# Altium PCB PCB2.PcbDoc
Units mm, origin at the board's own origin, x right, y up, seen from the top; angles counter-clockwise.
Board outline 80 x 80 mm, 4 copper layers (Top Layer, Int1 (GND), Int2 (PWR), Bottom Layer), stack 1.369 mm thick; 59 components, 28 nets, 206 pads, 294 vias.
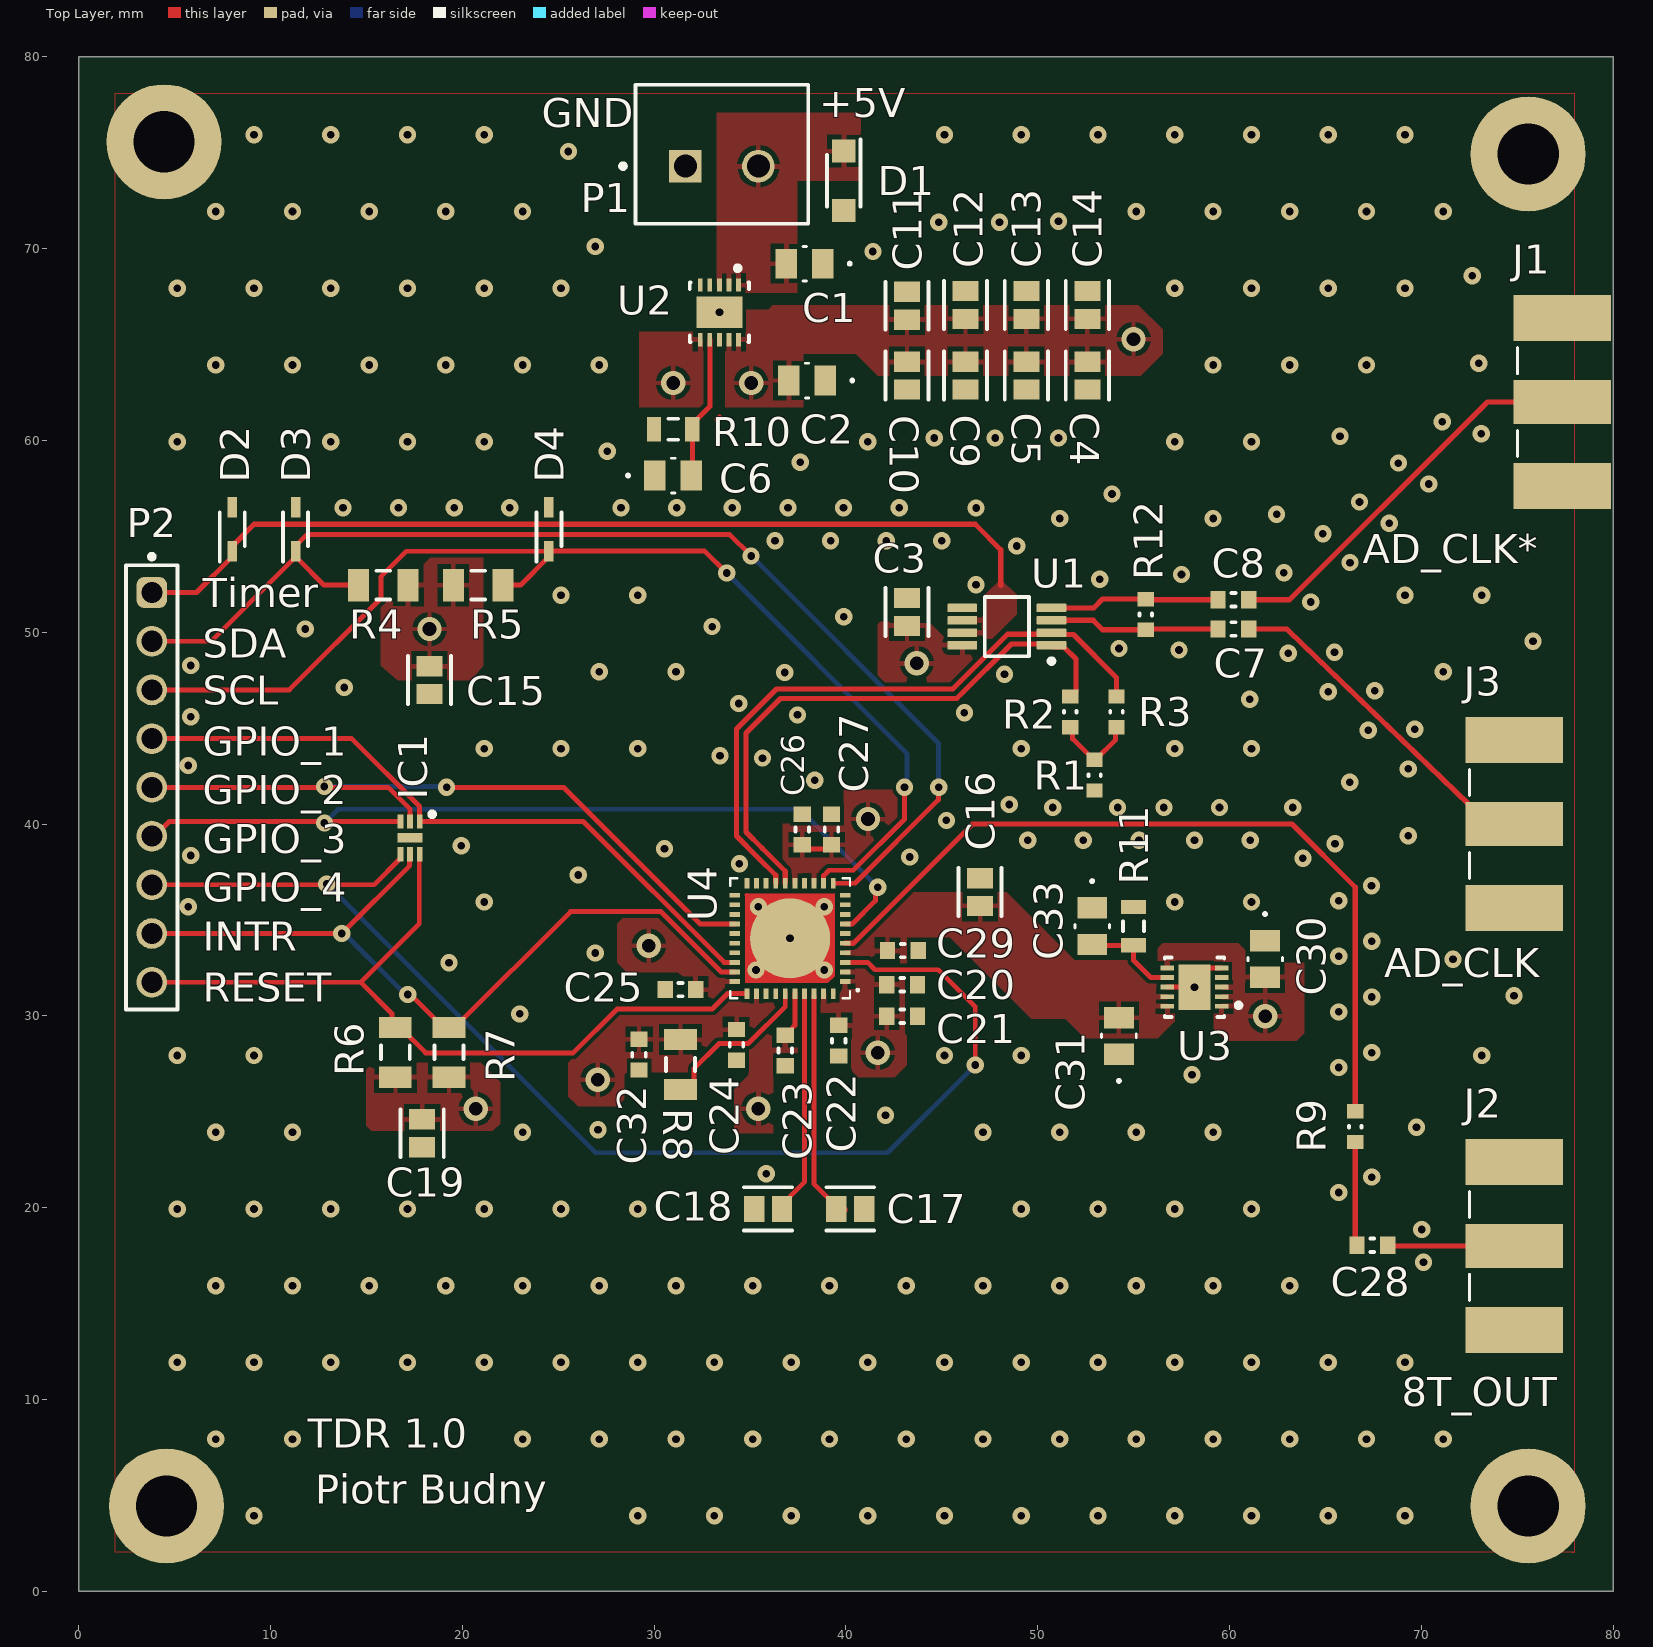
[diagram p0: Top Layer view]
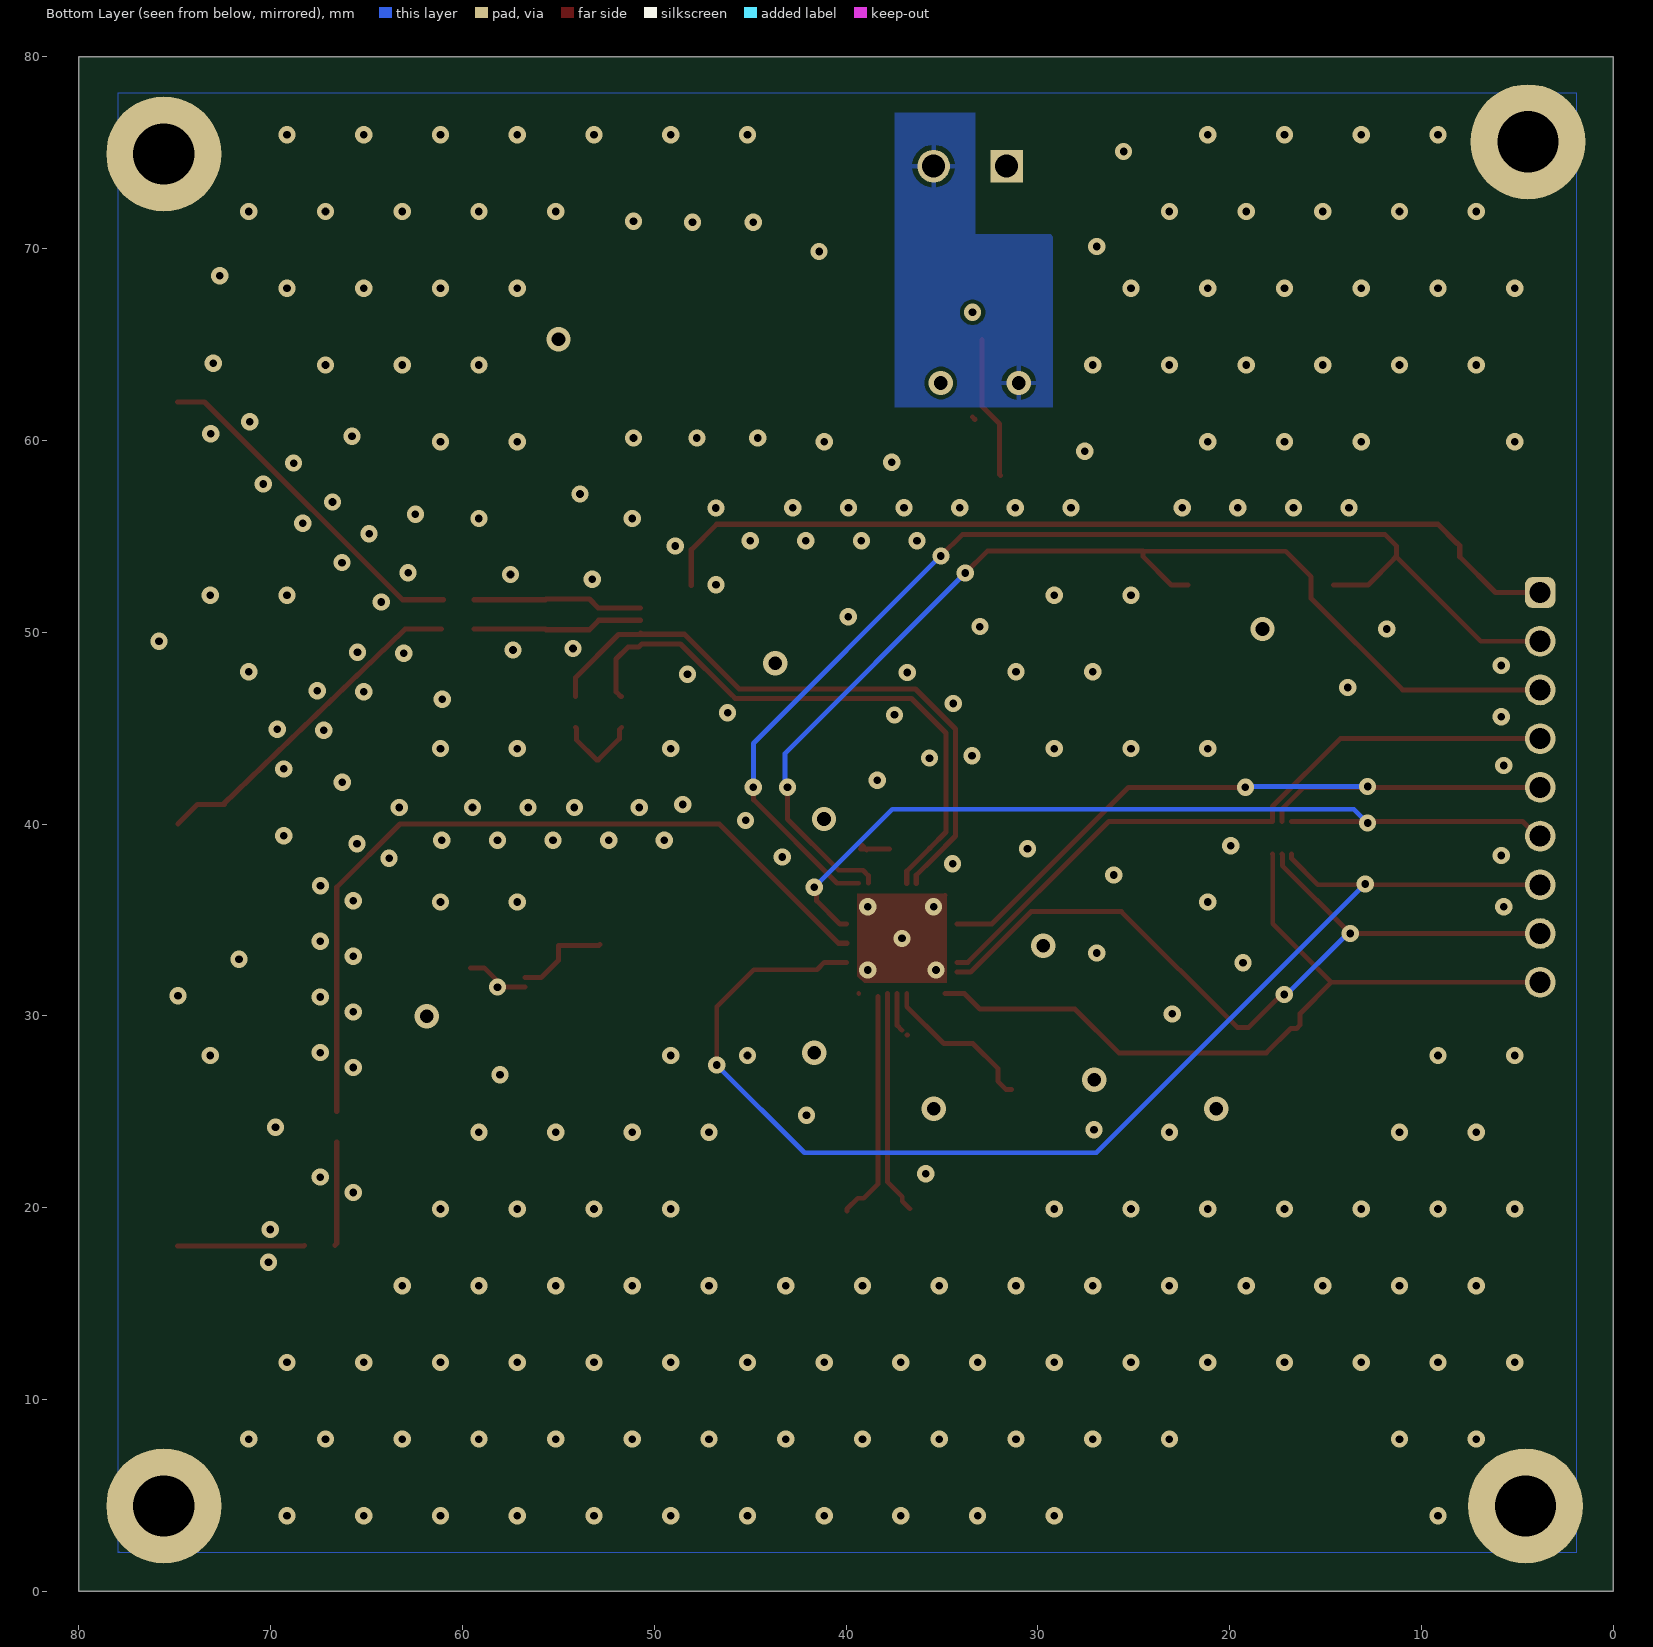
[diagram p1: Bottom Layer view, seen from below]
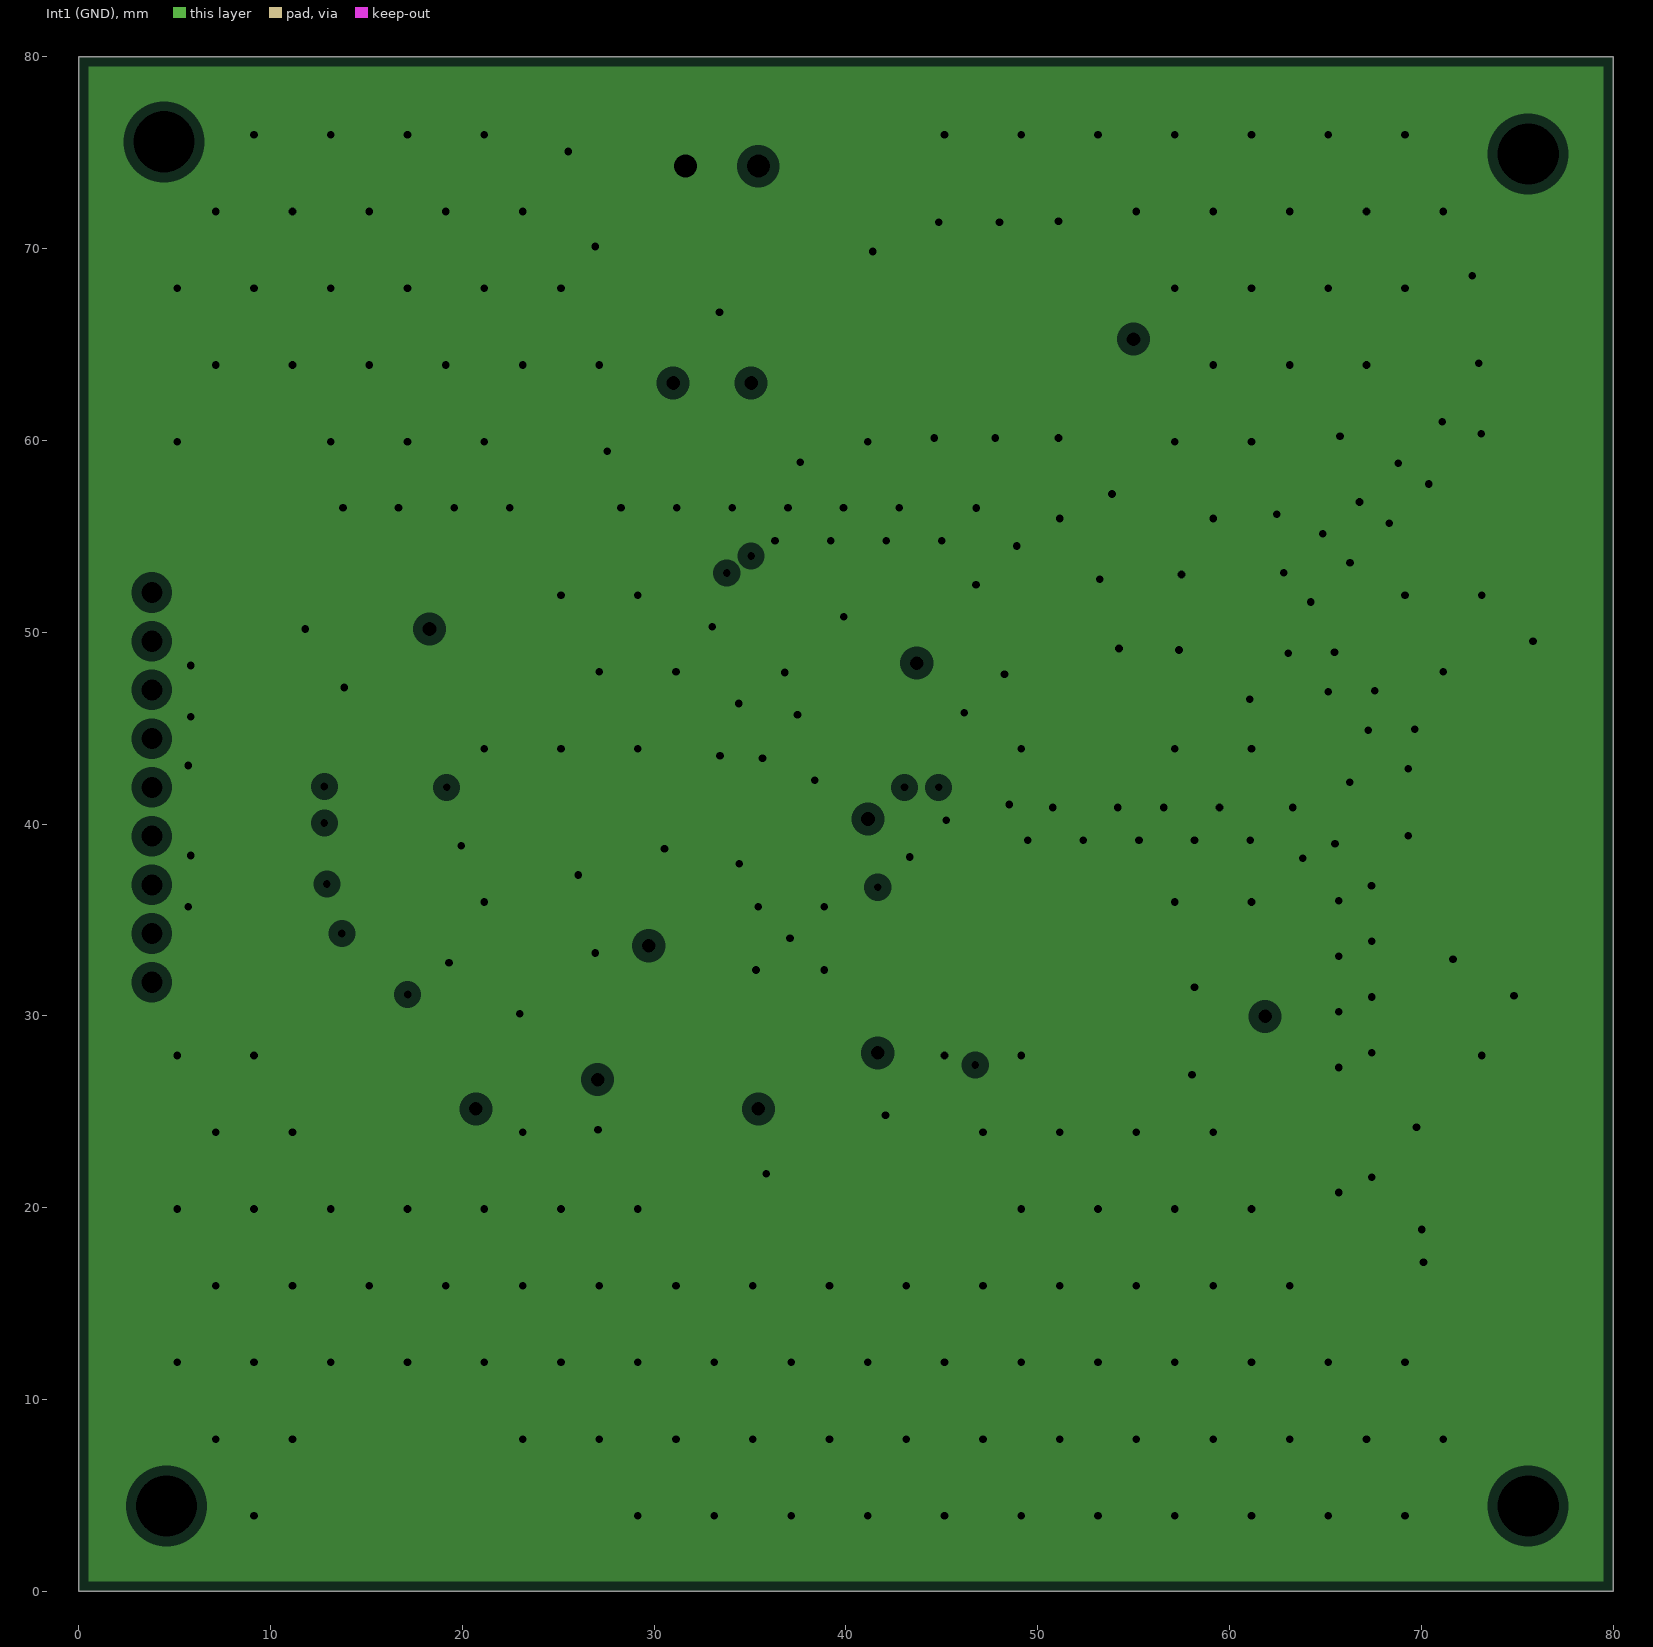
[diagram p2: Int1 (GND), clearances drawn from the general rule]
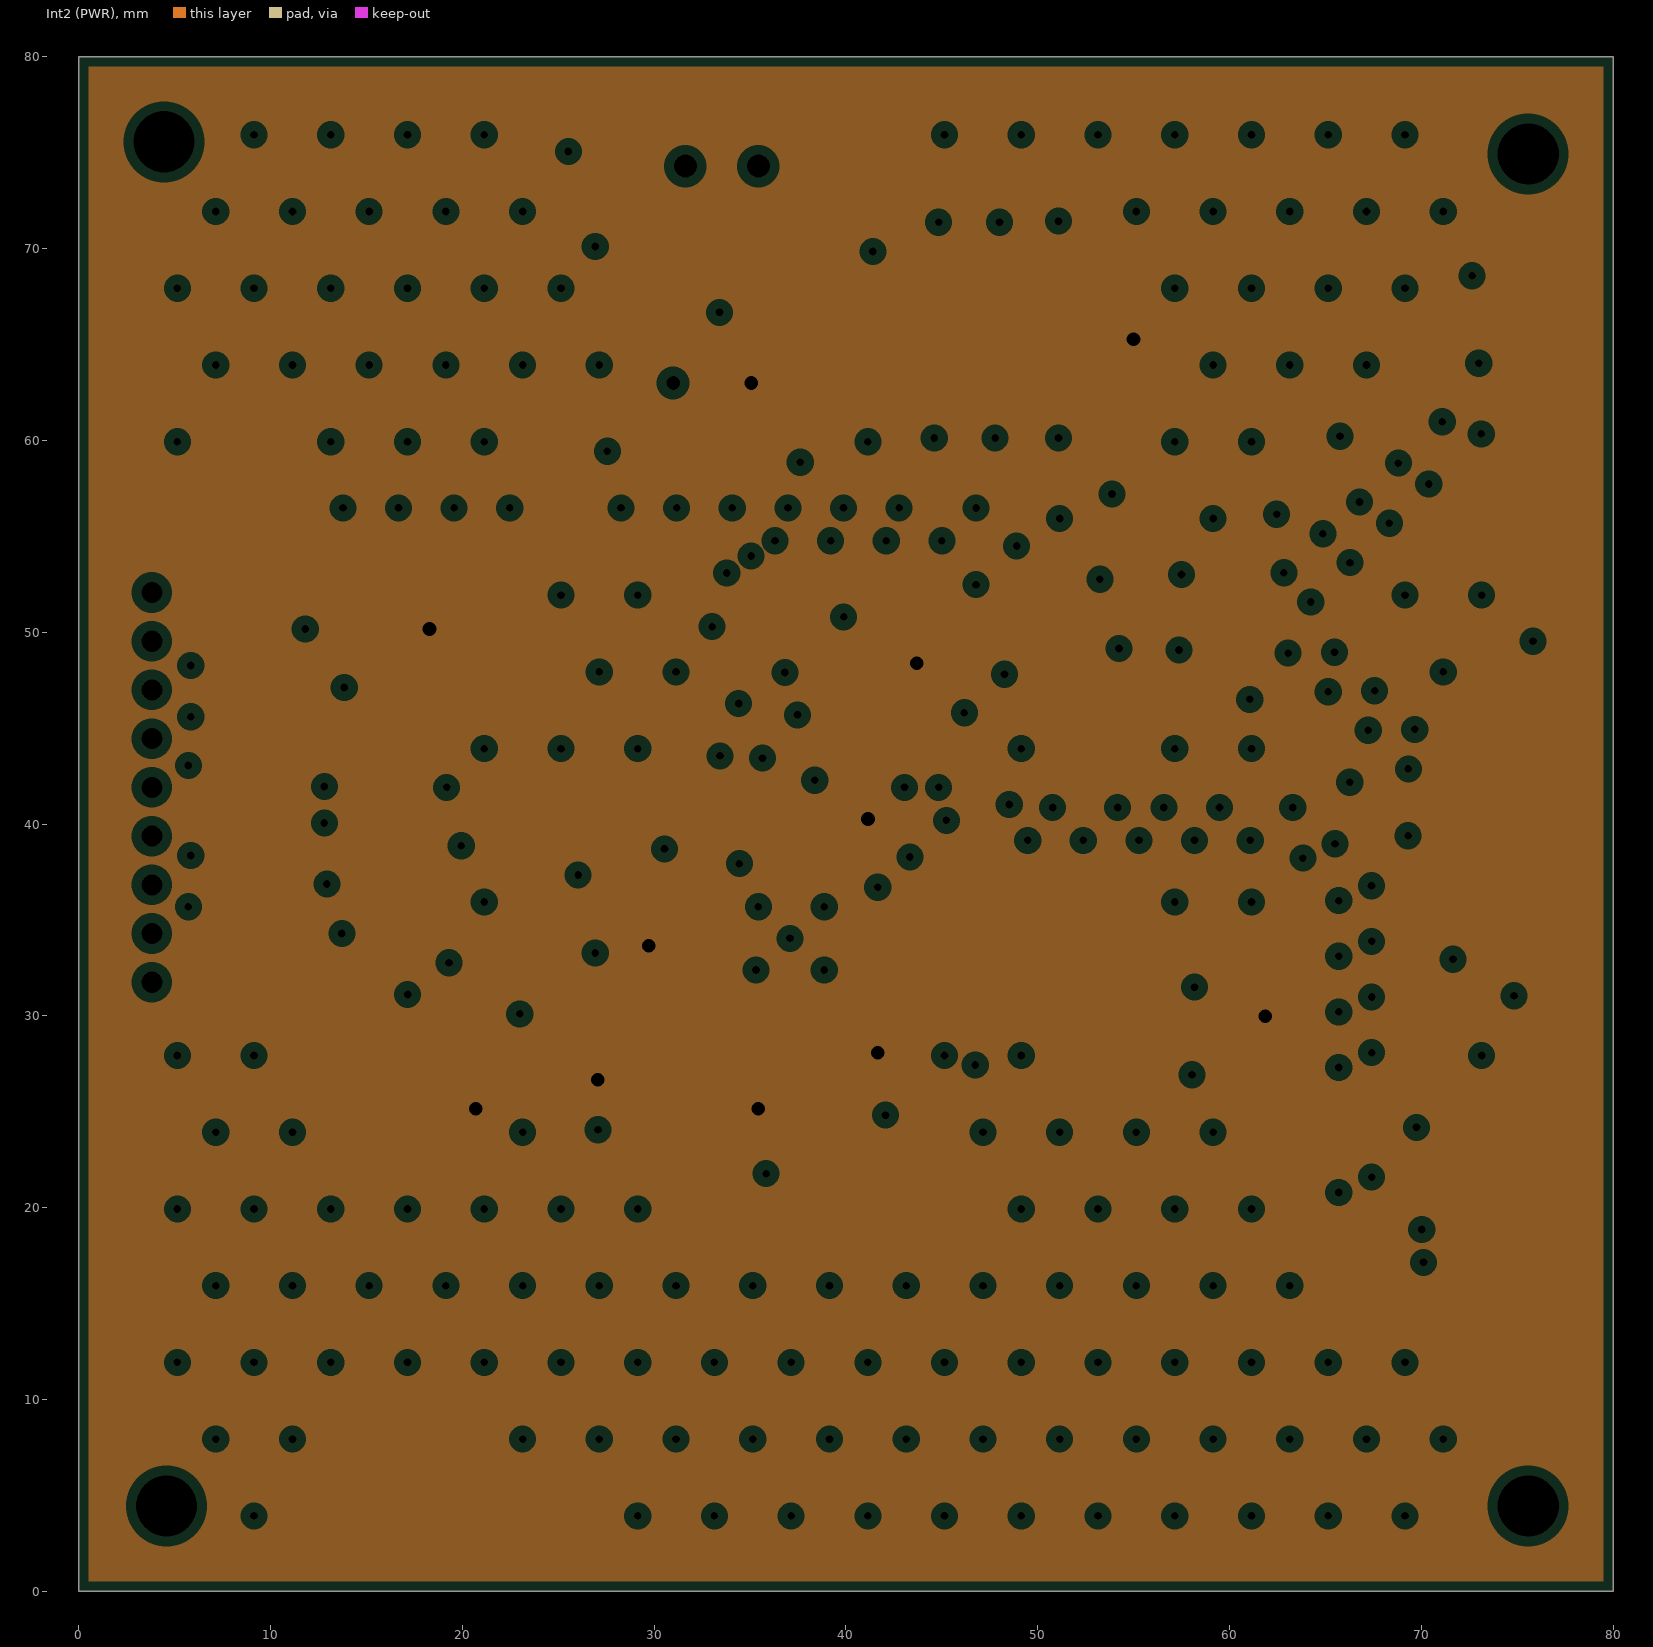
[diagram p3: Int2 (PWR), clearances drawn from the general rule]
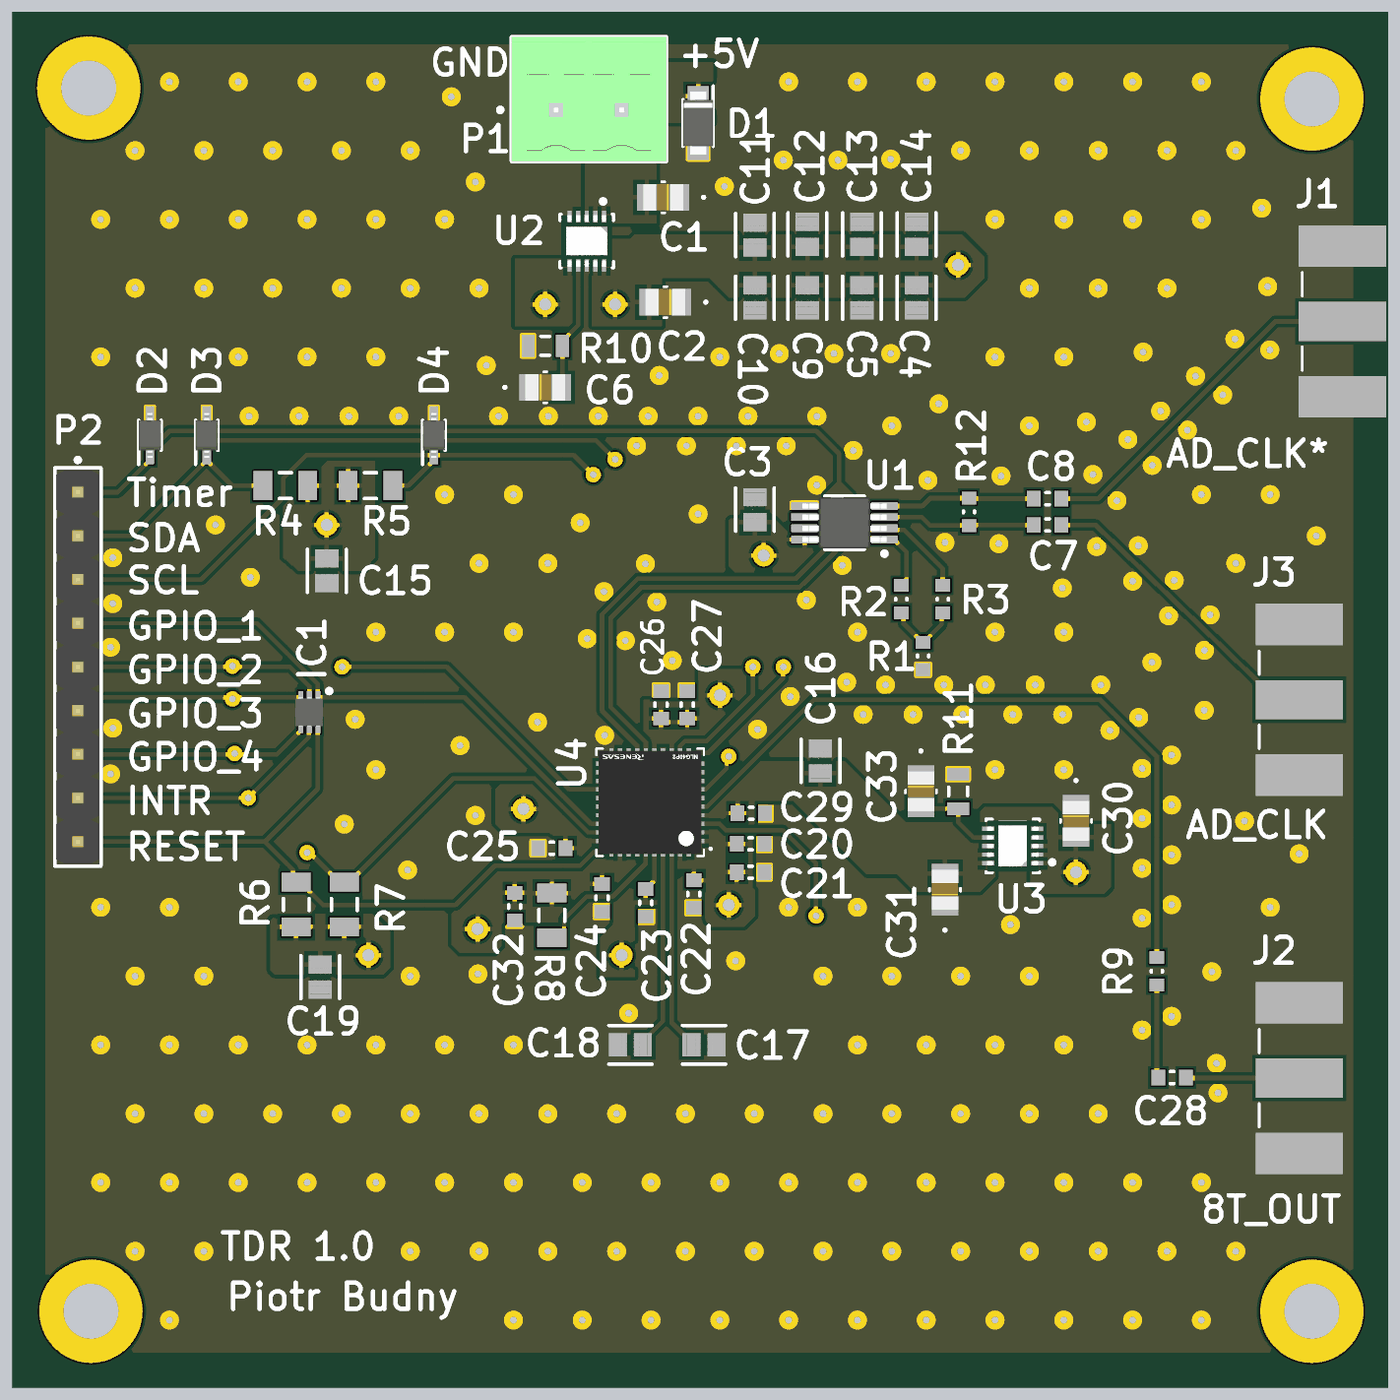
[diagram p4: 3D render of the assembled board from above, using the file's embedded part models]

## Layer stack, top to bottom
Top Solder: solder mask 0.0254, SM-001, Dk 4
Top Layer: signal copper 0.035
Dielectric 1: prepreg 0.1295, PP-017, Dk 4.3
Dielectric 2: prepreg 0.1295, PP-017, Dk 4.3
Int1 (GND): plane copper 0.035, net GND
Dielectric 3: core 0.7112, Core-039, Dk 4.8
Int2 (PWR): plane copper 0.035, net +3V3
Dielectric 4: prepreg 0.1295, PP-017, Dk 4.3
Dielectric 5: prepreg 0.1295, PP-017, Dk 4.3
Bottom Layer: signal copper 0.035
Bottom Solder: solder mask 0.0254, SM-001, Dk 4

## Board outline
0,0 0,80 80,80 80,0

## Design rules (kind name [scope] priority, off if disabled: settings)
Clearance [All] p1: gap=0.203 ignorepadtopadclearanceinfootprint=TRUE
DiffPairsRouting [All] p1: maxlimit=0.254 minlimit=0.203 mostfreqgap=0.254 toplayer_minwidth=0.254 toplayer_maxwidth=0.254 toplayer_prefwidth=0.254 bottomlayer_minwidth=0.381 bottomlayer_maxwidth=0.381 bottomlayer_prefwidth=0.381 maxuncoupledlength=12.7
HoleSize [All] p1: absolutevalues=TRUE maxlimit=3.2 minlimit=0.025 maxpercent=80.000 minpercent=20.000
MinimumSolderMaskSliver [All] p1: minsoldermaskwidth=0.2
PlaneClearance [All] p1: clearance=0.508
PlaneConnect [All] p1: planeconnectstyle=Relief reliefexpansion=0.508 reliefentries=4 reliefconductorwidth=0.254 reliefairgap=0.254
PolygonConnect PolygonConnect_2 [All vs IsNamedPolygon('NONET_L04_P043')] p1: connectstyle=Direct reliefconductorwidth=0.254 reliefentries=4 polygonreliefangle="90 Angle" airgapwidth=0.254
PolygonConnect PolygonConnect_1 [All vs IsNamedPolygon('NONET_L01_P042')] p2: connectstyle=Direct reliefconductorwidth=0.254 reliefentries=4 polygonreliefangle="90 Angle" airgapwidth=0.254
PolygonConnect [All] p3: connectstyle=Relief reliefconductorwidth=0.254 reliefentries=4 polygonreliefangle="90 Angle" airgapwidth=0.254
RoutingVias [All] p1: holewidth=0.711 width=1.27 viastyle="Through Hole" minholewidth=0.711 minwidth=1.27 maxholewidth=0.711 maxwidth=1.27
SilkToSolderMaskClearance [IsPad] p1: minsilkscreentomaskgap=0.2 clearancetoexposedcopper=TRUE
SolderMaskExpansion [All] p1: expansion=0.102 istentingtop=FALSE
SupplyNets "Schematic Supply Nets_2" [InNet('+3V3')] p1: voltage=0.000
SupplyNets "Schematic Supply Nets_1" [InNet('+1V8')] p2: voltage=0.000
SupplyNets "Schematic Supply Nets" [InNet('GND')] p3: voltage=0.000
Width [InNetClass('IMP50')] p1: maxlimit=0.272 minlimit=0.272 preferedwidth=0.272 impedanceprofiledriven=TRUE impedanceprofileid={48875BC2-758B-4BB3-9FE0-D4E46BE26CB8} impedanceprofilevalue=50.000000 minimp=50.000000 maximp=50.000000 favimp=50.000000
24 further rules are at their usual default settings.

## Classes and differential pairs
component class TDR_Schematic_PB: C1 C2 C3 C4 C5 C6 C7 C8 C9 C10 C11 C12 C13 C14 C15 C16 C17 C18 C19 C20 C21 C22 C23 C24 C25 C26 C27 C28 C29 C30 C31 C32 C33 D1 D2 D3 D4 IC1 P1 P2 R1 R2 R3 R4 R5 R6 R7 R8 R9 R10 R11 R12 U1 U2 U3 U4
differential pair ADC_CLK: +ADC_CLK_P -ADC_CLK_N
differential pair 8T_CLK: +8T_CLK_P -8T_CLK_N

## Components (designator, comment, footprint, x,y, rotation, side; value= is the part's Value field where it differs from the comment)
C1 "4.7 uF" CAP_C0805X-HAC-DR_KEM 37.846,69.215 r180 top
C2 "10 uF" CAP_C0805X-HAC-DR_KEM 37.973,63.119 r180 top
C3 "0.1uF" FP-CL21-IPC_C 43.18,51.054 r90 top (schematic designator C6)
C4 "0.1uF" FP-CL21-IPC_C 52.578,63.373 r270 top
C5 "0.1uF" FP-CL21-IPC_C 49.403,63.373 r270 top
C6 "DNM" CAP_C0805X-HAC-DR_KEM 30.988,58.166 r0 top (schematic designator C3)
C7 "10pF" CAPC0603 60.198,50.165 r0 top (schematic designator C4)
C8 "10pF" CAPC0603 60.198,51.689 r0 top (schematic designator C5)
C9 "0.1uF" FP-CL21-IPC_C 46.228,63.373 r270 top
C10 "0.1uF" FP-CL21-IPC_C 43.18,63.373 r270 top
C11 "0.1uF" FP-CL21-IPC_C 43.18,67.02 r90 top
C12 "0.1uF" FP-CL21-IPC_C 46.228,67.056 r90 top
C13 "0.1uF" FP-CL21-IPC_C 49.403,67.056 r90 top
C14 "0.1uF" FP-CL21-IPC_C 52.578,67.056 r90 top
C15 "0.1uF" FP-CL21-IPC_C 18.288,47.498 r90 top
C16 "0.1uF" FP-CL21-IPC_C 46.99,36.449 r90 top
C17 "0.1uF" FP-CL21-IPC_C 40.223,19.939 r0 top
C18 "0.1uF" FP-CL21-IPC_C 35.941,19.939 r180 top
C19 "0.1uF" FP-CL21-IPC_C 17.907,23.876 r270 top
C20 "100pF" CAPC0603 42.926,31.623 r180 top
C21 "100pF" CAPC0603 42.926,29.972 r180 top
C22 "100pF" CAPC0603 39.624,28.702 r90 top
C23 "100pF" CAPC0603 36.83,28.194 r90 top
C24 "100pF" CAPC0603 34.29,28.486 r90 top
C25 "100pF" CAPC0603 31.369,31.369 r0 top
C26 "100pF" CAPC0603 37.719,39.713 r270 top
C27 "100pF" CAPC0603 39.243,39.713 r270 top
C28 "10pF" CAPC0603 67.437,18.034 r0 top
C29 "100pF" CAPC0603 42.964,33.401 r0 top
C30 "4.7uF" CAP_C0805X-HAC-DR_KEM 61.849,32.956 r270 top (schematic designator C35)
C31 "10uF" CAP_C0805X-HAC-DR_KEM 54.229,28.956 r90 top (schematic designator C36)
C32 "100pF" CAPC0603 29.21,27.978 r90 top
C33 "DNM" CAP_C0805X-HAC-DR_KEM 52.832,34.671 r270 top (schematic designator C41)
D1 "SMF5.0A-T13" SODFL3618X110N 39.878,73.533 r270 top
D2 "AQ4020-01FTG" SOD2613X114N 8.001,55.372 r90 top (schematic designator D3)
D3 "AQ4020-01FTG" SOD2613X114N 11.303,55.372 r90 top (schematic designator D4)
D4 "AQ4020-01FTG" SOD2613X114N 24.512,55.372 r90 top (schematic designator D5)
IC1 "UCLAMP3306P.TCT" SON50P160X160X65-7N 17.272,39.282 r270 top
J1 "142-0701-851" CONN_142-0701-851_CIN 77.5,62 r270 top
J2 "142-0701-851" CONN_142-0701-851_CIN 75,18 r270 top
J3 "142-0701-851" CONN_142-0701-851_CIN 75,40 r270 top (schematic designator J4)
P1 "1803426" PHOE-1803426_V 33.528,74.295 r0 top
P2 "61300911121" 61300911121 3.81,41.91 r270 top
R1 "Resistor" RESC0603 52.959,42.545 r270 top value=50
R2 "Resistor" RESC0603 51.689,45.847 r270 top value=50
R3 "Resistor" RESC0603 54.102,45.847 r270 top value=50
R4 "10K" RESC3216X70X50LL20T25 15.875,52.451 r0 top
R5 "10K" RESC3216X70X50LL20T25 20.828,52.451 r180 top
R6 "10K" RESC3216X70X50LL20T25 16.51,28.097 r90 top
R7 "10K" RESC3216X70X50LL20T25 19.304,28.097 r90 top
R8 "10K" RESC3216X70X50LL20T25 31.369,27.462 r90 top
R9 "Resistor" RESC0603 66.548,24.219 r90 top value=50
R10 "Resistor" RES0805 30.988,60.579 r0 top value=33.2K
R11 "Resistor" RES0805 54.991,34.671 r270 top value=18.2K
R12 "Resistor" RESC0603 55.626,50.927 r270 top value=100
U1 "SN65EPT22DGKR" DGK0008A_M 48.387,50.292 r180 top (schematic designator U2)
U2 "LT3045EDD#PBF" FP-LT3045EDD#PBF-MFG 33.401,66.675 r270 top (schematic designator U1)
U3 "LT3045EDD#PBF" FP-LT3045EDD#PBF-MFG 58.166,31.496 r180 top (schematic designator U4)
U4 "8T49N241-999NLGI" NLG40P2_MFG 37.084,34.036 r180 top

## Footprints (in the part's own frame and the unit in brackets; to place one, negate y for a bottom-side part, rotate by r counter-clockwise, add the part's x,y. Pads: shape width x height; smd on the part's side, far side on the other; paste and mask are expansions set on the pad)
61300911121 [mm] "Pin Header, pitch 2.54 mm, THT, Vertical, single row, 9p"
  rrect50% 1.6x1.6 hole 1.1: 1(-10.16,0)
  round 1.6 hole 1.1: 2(-7.62,0) 3(-5.08,0) 4(-2.54,0) 5(0,0) 6(2.54,0) 7(5.08,0) 8(7.62,0) 9(10.16,0)
  silkscreen extent -12.15,-1.35 11.58,1.35, body extent -11.43,-1.27 11.43,1.27, height 8.57
CAP_C0805X-HAC-DR_KEM [mil]
  rect 44x61 smd paste+0 mask+0: 1(-37.5,0) 2(37.5,0)
  silkscreen extent -96,-36 3,36, body extent -46,-31 46,31, height 39
CAPC0603 [mm] "Chip Capacitor, 2-Leads, Body 1,60x0,80mm, IPC Medium Density"
  rect 0.8x0.9 smd: 1(-0.8,0) 2(0.8,0)
  silkscreen extent -0.1,-0.35 0.1,0.35, body extent -0.83,-0.43 0.82,0.42, height 0.5
CONN_142-0701-851_CIN [mil]
  rect 90x200 smd paste+0 mask+0: 1(0,-6.5)
  rect 95x200 smd paste+0 mask+0: 2(-172.5,-6.5) 3(172.5,-6.5)
  round 60 smd paste-100 mask-100: 4(-172.5,-6.5) 5(172.5,-6.5)
  silkscreen extent -112,-99 112,-98
DGK0008A_M [mm] "TSOP, 8-Leads, Body 3.1x3.1mm, Pitch 0.65mm, IPC Low Density"
  rrect22% 1.55x0.45 smd: 1(-2.325,0.975) 2(-2.325,0.325) 3(-2.325,-0.325) 4(-2.325,-0.975) 5(2.325,-0.975) 6(2.325,-0.325) 7(2.325,0.325) 8(2.325,0.975)
  silkscreen extent -2.45,-1.55 1.15,1.92, body extent -2.45,-1.5 2.45,1.5, height 0.94
FP-CL21-IPC_C [mm]
  rect 1.055x1.356 smd paste+0 mask+0: 1(-0.726,0) 2(0.726,0)
  silkscreen extent -1.25,-1.12 1.25,1.12, body extent -1.35,-0.82 1.35,0.82, height 0.25
FP-LT3045EDD#PBF-MFG [mm]
  rect 0.7x0.25 smd paste+0 mask+0: 1(-1.425,1) 2(-1.425,0.5) 3(-1.425,0) 4(-1.425,-0.5) 5(-1.425,-1) 6(1.425,-1) 7(1.425,-0.5) 8(1.425,0) 9(1.425,0.5) 10(1.425,1)
  rect 1.65x2.38 smd paste+0 mask+0: 11(0,0)
  silkscreen extent -2.42,-1.55 1.55,1.55, body extent -1.88,-1.65 1.88,1.65, height 0.25
NLG40P2_MFG [mm] "Recommended Land Pattern"
  rect 0.55x0.25 smd paste+0 mask+0: 1(-2.875,2.25) 2(-2.875,1.75) 3(-2.875,1.25) 4(-2.875,0.75) 5(-2.875,0.25) 6(-2.875,-0.25) 7(-2.875,-0.75) 8(-2.875,-1.25) 9(-2.875,-1.75) 10(-2.875,-2.25) 21(2.875,-2.25) 22(2.875,-1.75) 23(2.875,-1.25) 24(2.875,-0.75) 25(2.875,-0.25) 26(2.875,0.25) 27(2.875,0.75) 28(2.875,1.25) 29(2.875,1.75) 30(2.875,2.25)
  rect 0.25x0.55 smd paste+0 mask+0: 11(-2.25,-2.875) 12(-1.75,-2.875) 13(-1.25,-2.875) 14(-0.75,-2.875) 15(-0.25,-2.875) 16(0.25,-2.875) 17(0.75,-2.875) 18(1.25,-2.875) 19(1.75,-2.875) 20(2.25,-2.875) 31(2.25,2.875) 32(1.75,2.875) 33(1.25,2.875) 34(0.75,2.875) 35(0.25,2.875) 36(-0.25,2.875) 37(-0.75,2.875) 38(-1.25,2.875) 39(-1.75,2.875) 40(-2.25,2.875)
  round 4.185 smd paste+0 mask+0: 41(0,0)
  Top Layer region: -1.975,2.325 2.325,2.325 2.325,-2.325 -2.325,-2.325 -2.325,1.975
  silkscreen extent -3.59,-3.13 3.13,3.13, body extent -3,-3 3,3, height 1
PHOE-1803426_V [mm] "THD, 2-Leads, Body 9.01x7.25mm, Pitch 3.81mm"
  rect 1.7x1.7 hole 1.2: 1(-1.905,0)
  round 1.7 hole 1.2: 2(1.905,0)
  silkscreen extent -5.28,-3 4.5,4.25, body extent -4.5,-3 4.51,4.25, height 9.2
RES0805 [mm] "Chip Resistor, 2-Leads, Body 2,00x1,23mm, IPC Medium Density"
  rect 0.75x1.3 smd: 1(-1,0) 2(1,0)
  silkscreen extent -0.25,-0.55 0.25,0.55, body extent -1.03,-0.63 1.02,0.63, height 0.6
RESC0603 [mm] "Chip Resistor, 2-Leads, Body 1,60x0,80mm, IPC Medium Density"
  rect 0.75x0.85 smd: 1(-0.8,0) 2(0.8,0)
  silkscreen extent -0.05,-0.33 0.05,0.33, body extent -0.83,-0.43 0.82,0.43, height 0.5
RESC3216X70X50LL20T25 [mm] "Chip Resistor, 2-Leads, Body 3.20x1.60mm, IPC High Density"
  rect 1.1x1.7 smd: 1(-1.3,0) 2(1.3,0)
  silkscreen extent -0.35,-0.75 0.35,0.75, body extent -1.7,-0.9 1.7,0.9, height 0.7
SOD2613X114N [mm]
  rect 1.075x0.5 smd: 1(-1.15,0) 2(1.15,0)
  silkscreen extent -1.69,-0.65 0.87,0.65, body extent -1.3,-0.65 1.3,0.65, height 1.14
SODFL3618X110N [mm]
  rect 1.2x1.22 smd: 1(-1.55,0) 2(1.55,0)
  silkscreen extent -2.15,-0.87 1.35,0.87, body extent -1.83,-0.87 1.83,0.87, height 1.1
SON50P160X160X65-7N [mm]
  rect 0.75x0.3 smd: 1(-0.85,0.5) 2(-0.85,0) 3(-0.85,-0.5) 4(0.85,-0.5) 5(0.85,0) 6(0.85,0.5)
  rect 0.5x1.3 smd: 7(0,0)
  silkscreen extent -1.35,1.03 -1.1,1.28, body extent -0.85,-0.8 0.85,0.8, height 0.65

## Part data
C1 C2 C6 C30 C31 C33: library part C0805X399C8HAC7800, "No Description Available", Manufacturer_Name=Kemet, Copyright="Copyright (C) 2025 Ultra Librarian. All rights reserved.", Manufacturer_Part_Number=C0805X399C8HAC7800
C3 C4 C5: library part CMP-2000-05017-2, "CL21 Series 0805 100nF 50V ±10% Tolerance X7R Multilayer Ceramic Chip Capacitor", Capacitance=100nF, Case Code (Imperial)=0805, Case Code (Metric)=2012, Dielectric=X7R, Max Operating Temperature=125°C, Min Operating Temperature=-55°C, Tolerance=10%, Voltage=50V, Case/Package=0805, Contact Plating=Tin, Depth=1.25mm, Height=0.85mm, Lead Free="Lead Free", Length=2mm, Material=Ceramic, Mount="Surface Mount", Packaging="Tape and Reel", Radiation Hardening=No, Thickness=0.037inch, Voltage Rating=50V, Voltage Rating (DC)=50V, Width=0.049inch
C7 C8 C20 C21 C22 C24 C25 C27 C32: library part C0603, "No Description Available", Manufacturer_Name=Kemet, Manufacturer_Part_Number=C0805X399C8HAC7800, Copyright="Copyright (C) 2025 Ultra Librarian. All rights reserved."
C9 C10 C11: library part C0603, "No Description Available", Capacitance=100nF, Case Code (Imperial)=0805, Case Code (Metric)=2012, Dielectric=X7R, Max Operating Temperature=125°C, Min Operating Temperature=-55°C, Tolerance=10%, Voltage=50V, Case/Package=0805, Contact Plating=Tin, Depth=1.25mm, Height=0.85mm, Lead Free="Lead Free", Length=2mm, Material=Ceramic, Mount="Surface Mount", Packaging="Tape and Reel", Radiation Hardening=No, Thickness=0.037inch, Voltage Rating=50V, Voltage Rating (DC)=50V, Width=0.049inch
C12 C13 C14 C15 C16 C17 C18 C19: library part C0603, "CAP SMD 0805", Capacitance=100nF, Case Code (Imperial)=0805, Case Code (Metric)=2012, Dielectric=X7R, Max Operating Temperature=125°C, Min Operating Temperature=-55°C, Tolerance=10%, Voltage=50V, Case/Package=0805, Contact Plating=Tin, Depth=1.25mm, Height=0.85mm, Lead Free="Lead Free", Length=2mm, Material=Ceramic, Mount="Surface Mount", Packaging="Tape and Reel", Radiation Hardening=No, Thickness=0.037inch, Voltage Rating=50V, Voltage Rating (DC)=50V, Width=0.049inch
C23 C26 C29: library part C0603, "CAP SMD 0805", Manufacturer_Name=Kemet, Manufacturer_Part_Number=C0805X399C8HAC7800, Copyright="Copyright (C) 2025 Ultra Librarian. All rights reserved."
C28: library part C0603, "CAP SMD 0603", Manufacturer_Name=Kemet, Manufacturer_Part_Number=C0805X399C8HAC7800, Copyright="Copyright (C) 2025 Ultra Librarian. All rights reserved."
D1: "TVS Diode (Uni-directional)", Manufacturer_Name=LITTELFUSE, Mouser Part Number=576-SMF5.0A-T13, Arrow Part Number=SMF5.0A-T13, Arrow Price/Stock=https://www.arrow.com/en/products/smf5.0a-t13/littelfuse?utm_currency=USD&region=nac, Datasheet Link=https://www.littelfuse.com/~/media/electronics/datasheets/tvs_diodes/littelfuse_tvs_diode_smf_datasheet.pdf.pdf, Height=1.1mm, Manufacturer_Part_Number=SMF5.0A-T13, Mouser Price/Stock=https://www.mouser.co.uk/ProductDetail/Littelfuse/SMF5.0A-T13?qs=aGgfWYEhH7lEohru0mAWAg%3D%3D
D2 D3 D4: "TVS Diode (Uni-directional)", Manufacturer_Name=LITTELFUSE, Mouser Part Number=576-AQ4020-01FTG, Arrow Part Number=AQ4020-01FTG, Arrow Price/Stock=https://www.arrow.com/en/products/aq4020-01ftg/littelfuse?utm_currency=USD&region=nac, Datasheet Link=https://componentsearchengine.com/Datasheets/2/AQ4020-01FTG.pdf, Height=1.14mm, Manufacturer_Part_Number=AQ4020-01FTG, Mouser Price/Stock=https://www.mouser.co.uk/ProductDetail/Littelfuse/AQ4020-01FTG?qs=YCa%2FAAYMW015W3B84qpvIw%3D%3D
IC1: "Integrated Circuit", Manufacturer_Name=SEMTECH, Mouser Part Number=947-UCLAMP3306P.TCT, Arrow Part Number=UCLAMP3306P.TCT, Arrow Price/Stock=https://www.arrow.com/en/products/uclamp3306p.tct/semtech?region=nac, Datasheet Link=https://www.arrow.com/en/products/uclamp3306p.tct/semtech, Height=0.65mm, Manufacturer_Part_Number=UCLAMP3306P.TCT, Mouser Price/Stock=https://www.mouser.co.uk/ProductDetail/Semtech/UCLAMP3306P.TCT?qs=rBWM4%252BvDhIfpXpVk%252BnR0dg%3D%3D
J1 J2 J3: "Description", Manufacturer_Name="Cinch Connectivity Solutions", Copyright="Copyright (C) 2025 Ultra Librarian. All rights reserved.", Manufacturer_Part_Number=142-0701-851, RefDes=RefDes, Type=Type
P1: library part CMP-2000-05826-1, "Male Header, Pitch 3.81 mm, 1 x 2 Position, Height 9.2 mm, Tail Length 3.4 mm", Manufacturer="Phoenix Contact", Package Description="Male Header, Pitch 3.81 mm, 1 x 2 Position, Height 9.2 mm", Datasheet URL=https://www.phoenixcontact.com/online/portal/cn/pxc/product_detail_page/!ut/p/b1/3VfHjrNIGHyWeQDG5HAkm5zjxQIM2AQDNvnp1zNa7WFX889l5YPpA6L1qUtVdFX3d4gPEYCiFAaBJHgID_Etma9lMl67W9J8fcf4iRJ1HIRRHAIZDANpTKVtR3IFAyUOwSEE0ZNTbb2iOquuOqg8OKsEReRD0XpT8cAJtHK1h62gd5Lwwj7fSR7gfNZiWNE2tu2Xg71pvaHw3VHbDIccysUbixteZxggMWJnxWgP9KIolKko13HrKNI0OD69xjcsLwZb9oJmcNi4flh1xw9LW6-eWTQ9nREGMg82nQ7i5d6Jdk07dw7fZbrokLagaoyYggEvB4C7H5W4HERjSAam7I1pSvC1iqzSu8itk8CidtE6n3bP2nD0Pp6iRD-LQiLob5pFzwLixwIWO7iH0PcgleukhedgldkYbrFLA5WSM7ufG5_qGPkUc9vEzZQaS901mlWkPYn5tWxhabkCUfW4SsSIbpPuMIJHpQReslhERyEnqVrZBIU1V5Nilrs5X123FVtC3BVOSLHMP1b6PfXsNSgk1T-F50SEmtzqQUXqhsW5rwQ1o0BXB2gELrcQ4gCUoNAFTBX6N2LEmxJz0Hclhr8rsXf1mPOuHoPf1WPwu3oMflePSW-7Fd81PGj4i1jqc2r6kGnO3K4b7QxsE14hAduG8C7FaT2GvZ7I-s0j05SGAI1kaO9y99Mt55acg9cLDNYaWwQcdDTPAtjrfMY1OBkOcVEr9HZ8tGspIQLbIVDtpjctgzHFMG4BAZsGvQthBBH4WA-nFo17BJ08nhvnnSIvtClxxDZLZLDt43EXgXAD-FUl6xp1LReX8w3Sb-3dEFiLergsTPmiPWlKHKTnUE9MvjMWis8MoKAxhXcLRQoyR1OjaJFnuS2q9AQSlWi71_PQS1I7hwNcTAR9vGjIY_k4yIf4mrafS9Z-gp_9mn329-4, Datasheet Version=02/2015, Manufacturer URL=http://www.phoenixcontact.com/, Mounting Technology=ThroughHole, Package Reference=1803426
P2: library part CMP-1502-01080-4, "THT Vertical Pin Header WR-PHD, Pitch 2.54 mm, Single Row, 9 pins", Color=Black, Contact Resistance=20mΩ, Current Rating=3A, Operating Supply Voltage=250V, Connector Type="Male Pin", Contact Material=Copper, Contact Mating Length=5.9944mm, Contact Plating=Gold, Gender=Male, Lead Pitch=2.54mm, Mount="Through Hole", Number of Contacts=9, Number of Pins=9, Number of Positions=9, Number of Rows=1, Orientation=Vertical, Packaging=Bulk, Pitch=2.54mm, RoHS=Compliant, Termination=Solder
R1 R2 R3 R10 R11 R12: library part R0805, "RES SMD 0805", SimulationGenericComponent=True, TC1=0, TC2=0
R4 R5: library part R0805, "RES SMD 0805", Manufacturer=Panasonic, Part Number=ERA8AEB103V
R6 R7 R8: library part R0603, "RES SMD 0603", Manufacturer=Panasonic, Part Number=ERA8AEB103V
R9: library part R0603, "RES SMD 0603", SimulationGenericComponent=True, TC1=0, TC2=0
U1: library part CMP-0327-00215-3, "4000 Mbps 3.3 V Dual LVTTL / LVCMOS to Differential LVPECL Buffer, 2 Tx and 2 Rx, -40 to +85 degC, 8-pin VSSOP (DGK), Green (RoHS & no Sb/Br)", Manufacturer="Texas Instruments", ComponentLink1Description="Manufacturer URL", ComponentLink1URL=http://www.ti.com/, ComponentLink2Description=Datasheet, ComponentLink2URL=http://www.ti.com/general/docs/lit/getliterature.tsp?genericPartNumber=SN65EPT22&fileType=pdf, ComponentLink3Description="URL Link1", ComponentLink3URL=SamplesURL:http://www.ti.com/product/sn65ept22#samples, DatasheetVersion=SLLS926A, Eco-Plan="Green (RoHS & no Sb/Br)", ICC(Max)(mA)=50, Input Signal="LVTTL, CMOS", Mounting Technology="Surface Mount", No. of Rx=2, No. of Tx=2, Output Signal=LVPECL, PackageDescription="8-Pin Thin Small Outline Package 3 x 3 mm Body ,0.65 mm Pitch", PackageReference=DGK0008A, PackageVersion="revE, May-2006", PartNumber=SN65EPT22DGKR, Signaling Rate(Mbps)=4000, SubFamily="PECL PHY", xECL=TRUE
U2 U3: library part CMP-09138-000240-1, "IC REG LINEAR 0V 500MA 10DFN", Case/Package=DFN, Dropout Voltage=260mV, Max Operating Temperature=125°C, Min Current Limit=570mA, Min Operating Temperature=-40°C, Output Current=500mA, Output Voltage=15V, Number of Regulators=1, RoHS Compliant=Yes, Series=-
U4: "Tin Active e3 CLOCK GENERATOR OTHER (Type) IC 18Weeks -40C 6mm 1GHz", Manufacturer Lifecycle Status=ACTIVE, Max Frequency=1GHz, Max Input Voltage=3.465V, Max Operating Temperature=85°C, Min Input Voltage=1.71V, Min Operating Temperature=-40°C, Package Quantity=0, ComponentLink1Description="Manufacturer's Website", ComponentLink1URL=http://www.renesas.com, ComponentLink2Description="Datasheet URL", ComponentLink2URL=https://octopart.com/cad-content/api/get-model-datasheet/15189/106937583, ComponentLink3Description="Manufacturer's Package Drawing", ComponentLink3URL=https://www.renesas.com/en/document/psc/package-outline-drawing-package-code-nlg40p2-40-vfqfp-n-60-x-60-x-090-mm-body-05mm-pitch, Contact Plating=Tin, Export Control Classification Number (ECCN) Code=NLR, Harmonized Tariff Schedule (HTS) Code=8540000000, Height=900µm, HelpURL=https://octopart.com/cad-content/api/get-model-datasheet/15189/106937583, Input=Crystal, Interface=I2C, Lead Free="Lead Free", Length=6mm, Lifecycle Status=Production, Max Output Frequency=1GHz, Mount="Surface Mount", MSL=3, Number of Circuits=1, Number of Pins=40, Output Type="HCSL, LVCMOS, LVDS, LVPECL", Part Family=8T49N241, Phase Jitter=350fs, Pitch=500µm, RoHS=Compliant, Thickness=900µm, Width=6mm

## Free pads (board coordinates)
  round 6 hole 3.2: 1(4.445,75.565) 2(75.565,74.93) 3(75.565,4.445) 4(4.572,4.445)

## Via types
v1: diameter 0.9, hole 0.4, Top Layer to Bottom Layer, 282 vias
v2: diameter 1.27, hole 0.711, Top Layer to Bottom Layer, 12 vias

## Nets (pads, with @x,y where several pads share a name; then routed paths per layer and width w, separated by ;. In a path a pad name is that pad's centre, name@x,y a point inside that pad or via, vN(x,y) a via of type N, cw(c..) or ccw(c..) an arc to the next point about the centre after c; other vN are vias at no path point)
8T_CLK_N: R3.1 U1.2 U4.17 | length 32.8
  Top Layer w0.254: U1.2 50.641,49.896 50.665,49.872 51.855,49.872
  Top Layer w0.272: U4.17 36.334,37.326 35.428,38.232 34.29,39.37 34.29,44.958 36.376,47.044 45.564,47.044 48.416,49.896 U1.2@50.641,49.896 ; 51.855,49.872 54.102,47.625 R3.1
8T_CLK_P: R2.1 U1.1 U4.16 | length 30.2
  Top Layer w0.254: 45.771,46.544 45.963,46.736 45.974,46.736 ; U1.1@50.641,49.388 U1.1 50.81,49.219 U1.1@51.365,49.219 ; R2.1 51.739,46.647 R2.1@51.987,46.895
  Top Layer w0.272: U4.16 36.834,37.533 35.635,38.732 34.79,39.577 34.79,44.751 36.584,46.544 45.771,46.544 ; 45.974,46.736 48.626,49.388 U1.1@50.641,49.388 ; U1.1@51.365,49.219 51.987,48.597 R2.1@51.987,46.895
+1V8: C16.1 C29.1 C31.2 U3.9 U3.10 U4.4
+3V3: C2.2 C3.1 C4.1 C5.1 C9.1 C10.1 C11.1 C12.1 C13.1 C14.1 C15.2 C19.1 C20.2 C21.2 C22.2 C23.2 C24.2 C25.2 C26.2 C27.2 C30.2 C32.2 R4.2 R5.2 R6.1 R7.1 R8.2 U1.8 U2.9 U2.10 U3.1 U3.2 U3.3 U3.6 U4.1 U4.2 U4.13 U4.15 U4.30 U4.32 U4.36 U4.39 | length 4
  Top Layer w0.254: C23.2@36.78,28.994 C23.2 ; C23.2@37.084,29.248 37.334,29.498 U4.36 ; C26.2@37.719,38.697 38.92,38.697 C27.2@39.243,38.697 ; C27.2@38.92,38.64 39.193,38.913 C27.2
  other v2: 20.701,25.146 35.433,25.146 27.051,26.67 41.656,28.067 61.849,29.972 29.718,33.655 41.148,40.259 43.688,48.387 18.288,50.165 35.052,62.992 54.991,65.278
+5V: C1.2 D1.1 P1.2 U2.1 U2.2 U2.3 U2.6
  other v2: 30.988,62.992
ADC_CLK_N: C8.2 J1.1 | length 18.1
  Top Layer w0.272: C8.2 63.127,51.689 72.482,61.044 73.438,62 J1.1@74.835,62
ADC_CLK_P: C7.2 J3.1 | length 17.9
  Top Layer w0.254: 62.981,50.165 63.055,50.094 ; J3.1@72.395,41.016 73.819,41.016 J3.1
  Top Layer w0.272: C7.2@61.087,50.165 62.981,50.165 ; 63.055,50.094 J3.1@72.482,41.016
GND: C1.1 C2.1 C3.2 C4.2 C5.2 C6.1 C9.2 C10.2 C11.2 C12.2 C13.2 C14.2 C15.1 C16.2 C17.2 C18.2 C19.2 C20.1 C21.1 C22.1 C23.1 C24.1 C25.1 C26.1 C27.1 C29.2 C30.1 C31.1 C32.1 C33.1 D1.2 D2.2 D3.2 D4.2 IC1.7 J1.2 J1.3 J1.4 J1.5 J2.2 J2.3 J2.4 J2.5 J3.2 J3.3 J3.4 J3.5 P1.1 R1.2 R10.1 R11.1 U1.5 U2.5 U2.8 U2.11 U3.5 U3.8 U3.11 U4.14 U4.20 U4.40 U4.41 | length 3.9
  Top Layer w0.254: 33.274,61.087 33.401,61.214 ; 34.834,36.286 35.052,36.068 ; 37.834,36.08 37.846,36.068 ; U4.40@39.332,31.163 U4.40 ; U3.8 v1(58.166,31.496) 58.166,31.798 58.864,32.496 U3.5
  other v1: 9.139,3.931 29.139,3.931 33.139,3.931 37.139,3.931 41.139,3.931 45.139,3.931 49.139,3.931 53.139,3.931 57.139,3.931 61.139,3.931 65.139,3.931 69.139,3.931 7.139,7.931 11.139,7.931 23.139,7.931 27.139,7.931 31.139,7.931 35.139,7.931 39.139,7.931 43.139,7.931 47.139,7.931 51.139,7.931 55.139,7.931 59.139,7.931 63.139,7.931 67.139,7.931 71.139,7.931 5.139,11.931 9.139,11.931 13.139,11.931 17.139,11.931 21.139,11.931 25.139,11.931 29.139,11.931 33.139,11.931 37.139,11.931 41.139,11.931 45.139,11.931 49.139,11.931 53.139,11.931 57.139,11.931 61.139,11.931 65.139,11.931 69.139,11.931 7.139,15.931 11.139,15.931 15.139,15.931 19.139,15.931 23.139,15.931 27.139,15.931 31.139,15.931 35.139,15.931 39.139,15.931 43.139,15.931 47.139,15.931 51.139,15.931 55.139,15.931 59.139,15.931 63.139,15.931 70.104,17.145 70.013,18.857 5.139,19.931 9.139,19.931 13.139,19.931 17.139,19.931 21.139,19.931 25.139,19.931 29.139,19.931 49.139,19.931 53.139,19.931 57.139,19.931 61.139,19.931 65.691,20.791 67.405,21.591 35.836,21.772 7.139,23.931 11.139,23.931 23.139,23.931 47.139,23.931 51.139,23.931 55.139,23.931 59.139,23.931 27.073,24.058 69.745,24.185 42.059,24.82 58.039,26.924 65.691,27.303 5.139,27.931 9.139,27.931 45.139,27.931 49.139,27.931 73.139,27.931 67.405,28.082 22.987,30.099 65.691,30.203 67.405,30.982 74.825,31.043 35.306,32.385 38.862,32.385 19.304,32.766 71.65,32.948 65.691,33.103 26.924,33.274 67.405,33.882 37.084,34.036 5.715,35.687 35.433,35.687 38.862,35.687 21.139,35.931 57.139,35.931 61.139,35.931 65.691,36.003 67.399,36.782 26.035,37.338 34.442,37.933 63.82,38.219 43.329,38.282 5.842,38.354 30.539,38.703 19.939,38.862 65.494,38.969 49.473,39.148 52.373,39.148 55.273,39.148 58.173,39.148 61.073,39.148 69.307,39.385 45.234,40.187 50.774,40.862 54.161,40.862 56.574,40.862 59.474,40.862 63.292,40.856 48.514,41.021 66.259,42.179 38.372,42.279 69.318,42.872 5.715,43.053 35.647,43.435 33.433,43.552 21.139,43.931 25.139,43.931 29.139,43.931 49.139,43.931 57.139,43.931 61.139,43.931 67.229,44.884 69.649,44.934 5.842,45.593 37.475,45.687 46.172,45.799 34.404,46.285 61.052,46.497 65.14,46.895 67.56,46.946 13.843,47.117 48.261,47.811 36.812,47.902 27.139,47.931 31.139,47.931 71.139,47.931 5.842,48.26 63.052,48.907 65.471,48.957 57.361,49.073 54.229,49.149 75.819,49.53 11.811,50.165 33.02,50.292 39.878,50.8 64.227,51.577 25.139,51.931 29.139,51.931 69.139,51.931 73.139,51.931 46.775,52.478 53.235,52.76 57.488,53.01 62.83,53.101 66.278,53.628 48.896,54.492 36.297,54.769 39.197,54.769 42.097,54.769 44.997,54.769 64.862,55.133 68.328,55.678 51.139,55.931 59.139,55.931 62.449,56.149 13.772,56.483 16.672,56.483 19.572,56.483 22.472,56.483 28.272,56.483 31.172,56.483 34.072,56.483 36.972,56.483 39.872,56.483 42.772,56.483 46.782,56.477 66.767,56.784 53.87,57.205 70.379,57.729 68.799,58.816 37.614,58.856 27.559,59.436 5.139,59.931 13.139,59.931 17.139,59.931 21.139,59.931 41.139,59.931 57.139,59.931 61.139,59.931 44.599,60.126 47.774,60.126 51.076,60.126 65.751,60.213 73.117,60.34 71.085,60.975 7.139,63.931 11.139,63.931 15.139,63.931 19.139,63.931 23.139,63.931 27.139,63.931 59.139,63.931 63.139,63.931 67.139,63.931 72.99,64.023 33.401,66.675 5.139,67.931 9.139,67.931 13.139,67.931 17.139,67.931 21.139,67.931 25.139,67.931 57.139,67.931 61.139,67.931 65.139,67.931 69.139,67.931 72.644,68.58 41.402,69.85 26.924,70.104 44.831,71.374 48.006,71.374 51.076,71.429 7.139,71.931 11.139,71.931 15.139,71.931 19.139,71.931 23.139,71.931 55.139,71.931 59.139,71.931 63.139,71.931 67.139,71.931 71.139,71.931 25.527,75.057 9.139,75.931 13.139,75.931 17.139,75.931 21.139,75.931 45.139,75.931 49.139,75.931 53.139,75.931 57.139,75.931 61.139,75.931 65.139,75.931 69.139,75.931
GPIO_1: IC1.1 P2.4 U4.28 | length 35.7
  Top Layer w0.254: P2.4 14.236,44.45 17.772,40.914 IC1.1 26.301,40.132 33.645,32.788 34.207,32.788 U4.28
GPIO_2: IC1.2 P2.5 U4.24 | length 38.9
  Top Layer w0.254: P2.5 16.129,41.91 17.272,40.767 IC1.2 ; v1(19.177,41.91) 25.273,41.91 32.397,34.786 U4.24
  Bottom Layer w0.254: v1(12.807,41.954) 19.133,41.954 v1(19.177,41.91)
GPIO_3: IC1.3 P2.6 U4.7 | length 46.9
  Top Layer w0.254: P2.6 3.956,39.37 4.718,40.132 IC1.3 ; U4.7 39.961,34.788 40.328,34.788 41.532,35.992 41.532,36.579 v1(41.656,36.703)
  Bottom Layer w0.254: v1(12.807,40.049) 13.524,40.767 37.592,40.767 v1(41.656,36.703)
GPIO_4: IC1.4 P2.7 U4.3 | length 66
  Top Layer w0.254: P2.7 15.395,36.83 16.772,38.207 IC1.4 ; U4.3 41.128,32.786 41.511,32.403 44.809,32.403 46.736,30.476 v1(46.736,27.432)
  Bottom Layer w0.254: v1(12.934,36.874) 26.948,22.86 42.164,22.86 v1(46.736,27.432)
INTR: IC1.5 P2.8 R7.2 U4.29 | length 41.8
  Top Layer w0.254: P2.8 v1(13.716,34.29) 17.252,37.826 17.252,38.412 IC1.5 ; v1(17.145,31.115) 17.286,31.115 19.004,29.397 19.604,29.397 25.64,35.433 30.353,35.433 33.5,32.286 U4.29
  Bottom Layer w0.254: v1(13.716,34.29) 13.843,34.29 17.018,31.115 v1(17.145,31.115)
NetC6_2: C6.2 R10.2 U2.7 | length 7.5
  Top Layer w0.254: C6.2 31.988,58.214 R10.2 31.988,60.854 32.901,61.767 U2.7
NetC7_1: C7.1 R12.2 U1.3 | length 8.9
  Top Layer w0.272: U1.3 52.888,50.617 53.378,50.127 R12.2 55.664,50.165 C7.1
NetC8_1: C8.1 R12.1 U1.4 | length 8.9
  Top Layer w0.272: U1.4 52.918,51.267 53.378,51.727 R12.1 55.664,51.689 C8.1
NetC17_1: C17.1 U4.38 | length 12.1
  Top Layer w0.254: U4.38@38.336,31.013 38.336,21.227 39.073,20.49 39.387,20.49 39.95,19.927 C17.1@39.95,19.812
NetC18_1: C18.1 U4.37 | length 11.7
  Top Layer w0.254: C18.1 37.067,20.339 37.067,20.557 37.834,21.324 U4.37
NetC28_1: C28.1 R9.1 | length 5.4
  Top Layer w0.272: R9.1 66.548,19.012 66.548,18.123 C28.1
NetC33_2: C33.2 R11.2 U3.7 | length 5.1
  Top Layer w0.254: C33.2 52.88,33.671 R11.2 54.991,32.893 55.888,31.996 U3.7
NetR1_1: R1.1 R2.2 R3.2 | length 4.5
  Top Layer w0.254: R2.2 51.814,44.922 51.814,44.44 52.909,43.345 53.009,43.345 54.041,44.377 54.041,44.986 R3.2
NetR8_1: R8.1 U4.35 | length 8.3
  Top Layer w0.254: R8.1 31.661,26.162 32.084,26.585 32.084,27.258 33.382,28.556 34.906,28.556 36.832,30.482 36.832,31.159 U4.35
NetR9_2: R9.2 U4.5 | length 42.2
  Top Layer w0.272: U4.5 40.39,33.786 46.609,40.005 63.246,40.005 66.548,36.703 R9.2
RESET: IC1.6 P2.9 R6.2 U4.31 | length 42.1
  Top Layer w0.254: P2.9 14.692,31.75 ; IC1.6 17.752,38.412 17.752,34.81 14.692,31.75 ; U4.31 33.828,31.161 33.02,30.353 28.067,30.353 25.781,28.067 18.08,28.067 16.81,29.337 16.51,29.337 16.323,29.524 16.323,30.119 14.692,31.75
SCL: D4.1 P2.3 R5.1 U4.12 | length 60
  Top Layer w0.254: P2.3 10.981,46.99 15.748,51.757 15.748,52.891 17.079,54.222 D4.1 ; R5.1@22.158,52.451 23.029,52.451 24.512,53.934 D4.1 ; v1(33.782,53.086) 32.639,54.229 24.519,54.229 D4.1 ; U4.12 38.836,36.913 38.836,37.312 39.116,37.592 40.386,37.592 43.053,40.259 v1(43.053,41.91)
  Bottom Layer w0.254: v1(33.782,53.086) 43.177,43.691 43.177,42.034 v1(43.053,41.91)
SDA: D3.1 P2.2 R4.1 U4.11 | length 62.3
  Top Layer w0.254: P2.2 6.899,49.53 D3.1@11.303,53.934 ; D3.1@11.408,53.83 12.786,52.451 R4.1 ; D3.1@11.426,53.848 11.303,53.971 11.303,54.509 11.883,55.09 33.937,55.09 v1(35.052,53.975) ; U4.11 40.467,36.911 44.815,41.259 44.815,41.894 v1(44.831,41.91)
  Bottom Layer w0.254: v1(35.052,53.975) 44.831,44.196 v1(44.831,41.91)
SMA_OUT: C28.2 J2.1 | length 6.6
  Top Layer w0.254: C28.2 C28.2@68.271,18
  Top Layer w0.272: C28.2@68.271,18 J2.1
TIMER_STM32: D2.1 P2.1 U1.6 U1.7 | length 48.7
  Top Layer w0.272: P2.1 6.137,52.07 8.001,53.934 D2.1 8.001,54.505 8.115,54.619 8.137,54.619 9.144,55.626 46.736,55.626 48.069,54.292 48.069,52.451 ; D2.1@8.001,54.509 8.124,54.632 D2.1@8.15,54.632
pads on no net: U2.4 U3.4 U4.6 U4.8 U4.9 U4.10 U4.18 U4.19 U4.21 U4.22 U4.23 U4.25 U4.26 U4.27 U4.33 U4.34

## Polygon pours and split planes (outlines as drawn)
GND on Bottom Layer "NONET_L04_P043" (solid, remove dead copper, shelved, pour order 43): 1.905,2.032 1.905,78.105 77.978,78.105 77.978,2.032 77.851,2.032 77.978,2.032 77.851,2.032
+5V on Bottom Layer "+5V_L04_P005" (solid, pour order 5): 37.465,77.089 37.465,61.722 29.21,61.722 29.21,70.612 29.337,70.739 33.274,70.739 33.274,77.089
GND on Top Layer "NONET_L01_P042" (solid, remove dead copper, shelved, pour order 42): 1.905,2.032 1.905,78.105 77.978,78.105 77.978,2.032 77.851,2.032 77.978,2.032 77.851,2.032
+3V3 on Top Layer "+3V3_L01_P033" (solid, pour order 33): 43.053,32.131 42.799,32.385 41.529,32.385 41.128,32.786 39.959,32.786 39.939,32.766 39.497,32.766 38.608,31.877 38.608,29.083 39.878,29.083 40.259,28.702 40.259,27.178 40.64,26.797 42.545,26.797 43.18,27.432 43.18,28.956 43.053,29.083
+3V3 on Top Layer "+3V3_L01_P041" (solid, pour order 41): 35.445,31.774 37.053,30.665 34.925,28.537 34.906,28.556 33.382,28.556 31.877,27.051 28.575,27.051 28.448,26.924 28.448,25.654 28.321,25.527 28.067,25.273 26.035,25.273 25.527,25.781 25.527,27.559 28.321,30.353 33.02,30.353 33.782,30.734 34.925,30.734
+3V3 on Top Layer "+3V3_L01_P030" (solid, pour order 30): 44.323,50.546 45.212,49.657 46.99,49.657 46.99,49.022 46.99,48.47 45.51,46.99 42.418,46.99 41.656,47.752 41.656,50.419 41.783,50.546
TIMER_STM32 on Top Layer "TIMER_STM32_L01_P014" (solid, pour order 14): 45.212,50.927 45.212,49.657 47.625,49.657 48.895,50.927 48.895,51.943 48.069,52.768 47.244,51.943 47.244,50.927
+3V3 on Top Layer "+3V3_L01_P039" (solid, pour order 39): 36.83,31.369 37.846,31.369 37.846,28.067 36.195,28.067 36.195,23.876 34.163,23.876 34.163,26.162 34.925,26.924 34.925,28.537 34.906,28.556 36.832,30.482 36.832,31.159 36.834,31.161 36.83,31.165
+1V8 on Top Layer "+1V8_L01_P037" (solid, pour order 37): 39.624,33.782 39.624,32.86 39.718,32.766 39.738,32.786 41.128,32.786 41.529,32.385 41.547,32.403 43.16,32.403 43.16,35.58 42.672,36.068 40.39,33.786 39.628,33.786
+1V8 on Top Layer "+1V8_L01_P036" (solid, pour order 36): 57.15,29.718 56.261,28.829 52.451,28.829 51.435,29.845 51.435,32.893 55.753,32.893 57.15,31.496
+3V3 on Top Layer "+3V3_L01_P032" (solid, pour order 32): 31.369,30.353 33.02,30.353 33.828,31.161 34.331,31.161 34.331,32.164 34.209,32.286 33.5,32.286 30.353,35.433 28.702,35.433 28.067,34.798 28.067,32.766 28.575,32.258 31.242,32.258 31.369,32.131 31.369,31.242
+3V3 on Top Layer "+3V3_L01_P026" (solid, pour order 26): 36.703,40.005 39.878,40.005 39.878,41.783 42.672,41.783 42.672,39.497 42.291,39.497 40.513,37.719 39.243,37.719 38.836,37.312 38.862,37.286 38.862,36.576 36.703,36.576
+3V3 on Top Layer "+3V3_L01_P023" (solid, pour order 23): 57.15,32.258 56.261,32.258 56.261,33.528 56.515,33.782 60.452,33.782 60.82,33.414 60.82,31.75 57.277,31.75 57.277,32.131
+3V3 on Top Layer "+3V3_L01_P021" (solid, pour order 21): 59.182,31.75 59.182,29.337 59.817,28.702 63.5,28.702 63.881,29.083 63.881,32.766 60.706,32.766 59.69,31.75
+3V3 on Top Layer "+3V3_L01_P006" (solid, pour order 6): 33.7,66.802 37.782,66.802 37.782,61.722 33.7,61.722
+1V8 on Top Layer "+1V8_L01_P040" (solid, pour order 40): 42.926,36.449 42.037,35.56 42.037,34.105 45.397,34.105 49.657,29.845 51.943,29.845 51.943,32.893 48.387,36.449 47.371,36.449
+5V on Top Layer "+5V_L01_P007" (solid, pour order 7): 32.703,65.659 32.703,61.722 29.21,61.722 29.21,65.659
+3V3 on Top Layer "+3V3_L01_P029" (solid, pour order 29): 55.372,63.373 56.515,64.516 56.515,65.786 55.245,67.056 36.191,67.056 35.687,66.552 35.687,65.659 35.687,64.516 40.513,64.516 41.656,63.373
+3V3 on Top Layer "+3V3_L01_P028" (solid, pour order 28): 15.748,51.308 18.669,54.229 21.082,54.229 21.082,48.26 20.447,47.498 16.637,47.498 15.748,48.26
+3V3 on Top Layer "+3V3_L01_P020" (solid, pour order 20): 20.955,27.559 15.367,27.559 14.986,27.178 14.986,24.257 15.24,24.003 21.59,24.003 21.971,24.384 21.971,26.543
+5V on Top Layer "+5V_L01_P008" (solid, pour order 8): 40.767,73.533 40.767,77.089 33.274,77.089 33.274,73.533
+5V on Top Layer "+5V_L01_P004" (solid, pour order 4): 33.274,67.691 37.465,67.691 37.465,77.089 33.274,77.089
+3V3 on Int2 (PWR) (split plane): 79.49,0.51 0.51,0.51 0.51,79.49 79.49,79.49
GND on Int1 (GND) (split plane): 79.49,0.51 0.51,0.51 0.51,79.49 79.49,79.49

## Silkscreen, mask and mechanical layers (free items; w line width, h text height)
Top Overlay:
  text "+5V" at 38.608,76.835 h1.52
  text "GND" at 24.13,76.327 h1.52
  text "AD_CLK*" at 66.929,53.594 h1.52
  text "Timer" at 6.477,51.308 h1.52
  text "SDA" at 6.477,48.675 h1.52
  text "SCL" at 6.477,46.228 h1.52
  text "GPIO_1" at 6.477,43.561 h1.52
  text "GPIO_2" at 6.477,41.021 h1.52
  text "GPIO_3" at 6.477,38.481 h1.52
  text "GPIO_4" at 6.477,35.941 h1.52
  text "INTR" at 6.477,33.401 h1.52
  text "AD_CLK" at 68.072,32.004 h1.52
  text "RESET" at 6.477,30.734 h1.52
  text "8T_OUT" at 68.961,9.652 h1.52
  text "TDR 1.0" at 11.938,7.493 h1.52
  text "Piotr Budny" at 12.319,4.572 h1.52
Mechanical 1:
  the board outline again, w0.254